# Altium PCB PCBtodojunto.PcbDoc (part 2 of 2)
Units mm, origin at the board's own origin, x right, y up, seen from the top; angles counter-clockwise.
Board outline 200 x 200 mm, 2 copper layers (Top Layer, Bottom Layer); 188 components, 125 nets, 535 pads, 53 vias.
Unrouted connection lines stored in the file: 78.
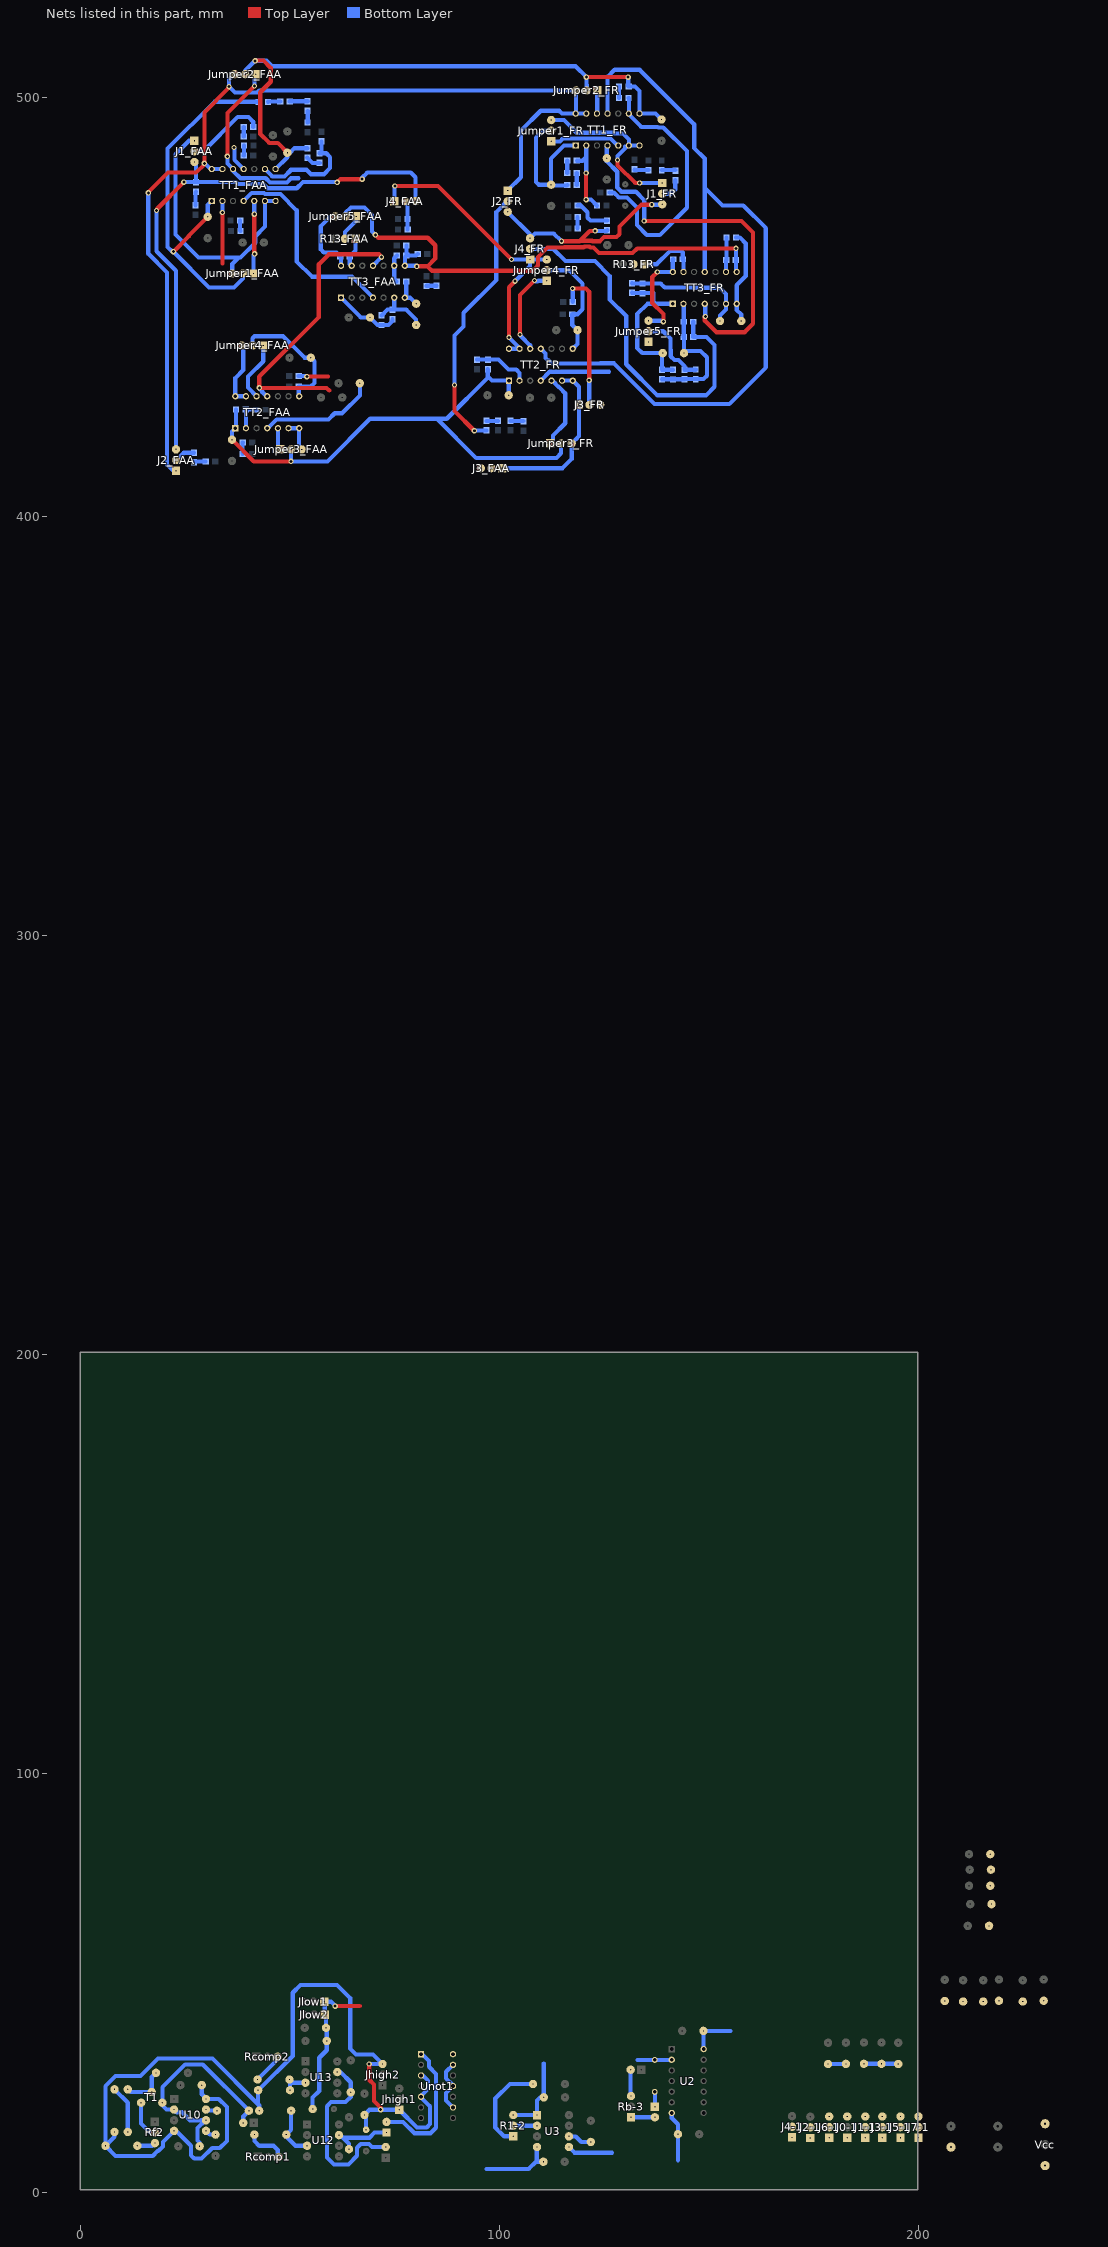
[diagram p2: the nets of this part, all layers, seen from the top]

## Via types
v1: diameter 1.27, hole 0.711, Top Layer to Bottom Layer, 53 vias

## Nets (pads, with @x,y where several pads share a name; then routed paths per layer and width w, separated by ;. In a path a pad name is that pad's centre, name@x,y a point inside that pad or via, vN(x,y) a via of type N, cw(c..) or ccw(c..) an arc to the next point about the centre after c; other vN are vias at no path point) (continued)
NetC9_FAA_2: C9_FAA.2 R18.b_FAA.2 R18_FAA.2 R20.b_FAA.1 R20_FAA.1 TT3_FAA.1 | length 18.2
  Bottom Layer w1: TT3_FAA.1@62.136,452.304 66.867,447.573 C9_FAA.2@69.056,447.573 70.842,445.787 R20.b_FAA.1@71.846,445.787 73.47,445.787 74.446,446.763 R20_FAA.1@74.446,447.17 R20_FAA.1@74.443,447.167 ; R18.b_FAA.2@82.556,455.09 82.606,455.14 R18_FAA.2@84.916,455.14
NetC9_FR_1: C9_FR.1 R17.b_FR.2 R17_FR.2 R18.b_FR.1 R18_FR.1 R22.b_FR.1 R22_FR.1 TT3_FR.2 | length 33.7
  Bottom Layer w1: R18.b_FR.1@138.746,432.81 141.329,432.81 R18_FR.1@141.376,432.763 141.423,432.81 R22.b_FR.1@144.126,432.81 144.179,432.863 R22_FR.1@146.826,432.863 148.696,432.863 149.496,433.663 149.496,438.083 147.986,439.593 144.546,439.593 C9_FR.1@144.016,439.063 144.016,442.89 R17.b_FR.2@143.963,442.943 R17_FR.2@143.963,446.553 143.963,450.765 TT3_FR.2@143.898,450.83
NetC9_FR_2: C9_FR.2 R18.b_FR.2 R18_FR.2 R20.b_FR.1 R20_FR.1 TT3_FR.1 | length 38.9
  Bottom Layer w1: R20_FR.1@131.636,453.463 131.706,453.393 R20.b_FR.1@134.076,453.393 136.74,453.393 136.746,453.387 136.746,451.393 137.309,450.83 ; TT3_FR.1@141.358,450.83 137.309,450.83 ; R18_FR.2@141.376,435.049 141.329,435.096 R18.b_FR.2@138.746,435.096 138.746,438.873 C9_FR.2@138.936,439.063 134.066,439.063 132.846,440.283 132.846,448.393 135.283,450.83 137.309,450.83
NetC10_FAA_1: C10_FAA.1 R20.b_FAA.2 R20_FAA.2 TT3_FAA.6 | length 14.1
  Bottom Layer w1: R20.b_FAA.2@71.846,448.073 73.229,449.456 R20_FAA.2@74.446,449.456 ; TT3_FAA.6@74.836,452.304 74.836,449.846 R20_FAA.2@74.446,449.456 ; C10_FAA.1@80.066,445.783 80.066,447.083 77.693,449.456 R20_FAA.2@74.446,449.456
NetC10_FAA_2: C10_FAA.2 R19_FAA.1 TT3_FAA.7 | length 7.3
  Bottom Layer w1: R19_FAA.1@77.689,456.163 77.689,452.617 TT3_FAA.7@77.376,452.304 78.625,452.304 C10_FAA.2@80.066,450.863
NetC10_FR_1: C10_FR.1 R20.b_FR.2 R20_FR.2 TT3_FR.6 | length 30.5
  Bottom Layer w1: R20_FR.2@131.636,455.749 131.706,455.679 R20.b_FR.2@134.076,455.679 138.452,455.679 139.428,454.703 146.228,454.703 146.278,454.653 152.606,454.653 154.058,453.201 TT3_FR.6@154.058,450.83 154.058,449.485 152.626,448.053 C10_FR.1@152.626,446.733
NetC10_FR_2: C10_FR.2 R19_FR.1 TT3_FR.7 | length 22.8
  Bottom Layer w1: R19_FR.1@156.449,466.663 157.346,466.663 158.766,465.243 158.766,457.443 156.598,455.275 TT3_FR.7@156.598,450.83 156.598,449.361 157.706,448.253 C10_FR.2@157.706,446.733
NetCcv_1: Ccv.1 U10.5 | length 2.7
  Bottom Layer w1: U10.5@29.896,14.619 30.785,13.73 Ccv.1@32.182,13.73
NetCf_1: Cf.1 Jsierra.2 R3.1 T1.2 U10.2 U10.6 | length 54.5
  Bottom Layer w1: Cf.1@28.372,10.936 28.372,11.825 27.864,12.333 27.864,15.274 U10.6@29.749,17.159 ; U10.6@29.896,17.159 U10.6@29.749,17.159 ; Jsierra.2@38.786,16.524 38.786,18.048 40.183,19.445 29.134,30.494 24.923,30.494 19.482,25.053 T1.2@19.482,21.35 19.482,20.715 20.498,19.699 U10.2@22.276,19.699 22.916,19.059 24.176,19.059 26.076,17.159 U10.6@29.749,17.159
NetCh_1: Ch.1 U3.6 | length 5.8
  Bottom Layer w1: U3.6@116.55,13.306 118.17,13.306 119.5,11.976 Ch.1@121.78,11.976
NetD1_2: D1.2 D2.1 | length 11.5
  Bottom Layer w1: D1.2@8.052,24.525 11.227,21.35 D2.1@11.227,14.365
NetD2_2: D2.2 Rd.2 T1.1 | length 11
  Bottom Layer w1: D2.2@11.227,24.525 11.862,23.89 T1.1@16.942,23.89 16.942,27.446 Rd.2@17.958,28.462
NetJ0-1_1: J0-1.1 J1-1.3
NetJ1-1_2: J1-1.2 J2-1.2
NetJ1-3_2: J1-3.2 Rb-3.3 | length 6.3
  Bottom Layer w1: J1-3.2@131.28,29.226 131.28,23.036 Rb-3.3@131.38,22.936
NetJ1_FAA_2: J1_FAA.2 R6.b_FAA.1 | length 19.2
  Bottom Layer w1: J1_FAA.2@27.13,487.233 29.25,487.233 37.46,495.443 40.02,495.443 41.179,494.284 R6.b_FAA.1@41.179,493.023
NetJ1_FR_2: J1_FR.2 R6.b_FR.1 | length 5.7
  Bottom Layer w1: J1_FR.2@138.826,477.133 140.946,477.133 141.946,478.133 R6.b_FR.1@141.946,480.323
NetJ2-1_1: J2-1.1 J3-1.3
NetJ2-3_1: J2-3.1 R1-3.1 | length 3.6
  Bottom Layer w1: R1-3.1@137.03,23.936 137.07,23.896 J2-3.1@137.07,20.386
NetJ2-3_2: J2-3.2 Rb-3.1 | length 5.7
  Bottom Layer w1: Rb-3.1@131.38,17.856 137.06,17.856 J2-3.2@137.07,17.846
NetJ2_FAA_2: J2_FAA.2 R10.b_FAA.1 | length 5
  Bottom Layer w1: J2_FAA.2@22.736,413.543 22.883,413.543 24.606,415.266 R10.b_FAA.1@27.056,415.266
NetJ2_FR_2: J2_FR.2 R10.b_FR.1 | length 64.8
  Top Layer w1: v1(89.23,431.44) 89.23,425.25 v1(93.95,420.53)
  Bottom Layer w1: v1(89.23,431.44) 89.23,443.28 91.4,445.45 91.4,448.71 99.21,456.52 99.21,472.767 101.773,475.33 J2_FR.2@101.92,475.33 ; v1@94.183,420.603 R10.b_FR.1@96.876,420.603
NetJ3-1_2: J3-1.2 J4-1.2
NetJ3_FAA_2: J3_FAA.2 R14_FAA.1 | length 6.8
  Top Layer w1: v1(53.98,433.443) 59.06,433.443
  Bottom Layer w1: R14_FAA.1@52.019,433.593 v1@53.78,433.593
NetJ3_FR_2: J3_FR.2 R14_FR.1 | length 34.6
  Top Layer w1: v1(117.442,454.499) 120.59,454.499 121.386,453.703 v1(121.386,432.583) ; J3_FR.2@121.386,426.793 J3_FR.2@121.466,426.713
  Bottom Layer w1: R14_FR.1@117.442,451.316 v1(117.442,454.499) ; v1(121.386,432.583) 121.386,426.793 J3_FR.2@121.466,426.713
NetJ4-1_1: J4-1.1 J5-1.3
NetJ4_FAA_2: J4_FAA.2 R17.b_FAA.1 R17_FAA.1 | length 7
  Bottom Layer w1: J4_FAA.2@77.406,475.363 78.019,474.75 R17.b_FAA.1@78.019,471.083 78.029,471.073 R17_FAA.1@78.029,468.593
NetJ4_FR_2: J4_FR.2 R17.b_FR.1 R17_FR.1 | length 88.9
  Bottom Layer w1: J4_FR.2@107.276,463.953 112.806,463.953 115.736,461.023 122.746,461.023 126.276,457.493 126.276,451.863 130.236,447.903 130.236,436.403 137.656,428.983 149.286,428.983 151.336,431.033 151.336,440.993 149.386,442.943 R17.b_FR.1@146.249,442.943 R17_FR.1@146.249,446.553
NetJ5-1_2: J5-1.2 J6-1.2
NetJ6-1_1: J6-1.1 J7-1.3
NetJcomp1_1: Jcomp1.1 Rup1.1 U12.7 | length 15.4
  Bottom Layer w1: U12.7@61.646,13.603 61.993,13.603 62.623,12.973 ; Rup1.1@64.04,10.256 64.04,11.556 62.623,12.973 ; Jcomp1.1@73,14.22 70.157,14.22 68.91,12.973 62.623,12.973
NetJcomp1_2: Jcomp1.2 Unot1.1 | length 32.7
  Bottom Layer w1: Jcomp1.2@73,16.76 76.956,16.76 79.66,14.056 83.53,14.056 84.84,15.366 84.84,28.206 83.13,29.916 83.13,31.296 81.5,32.926 Unot1.1@81.25,32.926
NetJcomp2_2: Jcomp2.2 Rup2.1 U13.7 | length 44.6
  Bottom Layer w1: U13.7@61.26,28.656 62.01,28.656 64.45,26.216 Rup2.1@64.45,23.836 64.45,22.726 63.2,21.476 59.757,21.476 58.79,20.509 58.79,8.296 60.463,6.623 63.887,6.623 65.94,8.676 65.94,10.596 66.837,11.493 68.827,11.493 69.554,10.766 Jcomp2.2@72.79,10.766
NetJumper1_FAA_1: Jumper1_FAA.1 TT1_FAA.5 | length 16.9
  Top Layer w1: v1@41.426,463.239 v1(41.426,472.249)
  Bottom Layer w1: Jumper1_FAA.1@41.24,458.083 41.24,462.503 v1(41.51,462.773) ; v1(41.426,472.249) TT1_FAA.5@41.426,475.384
NetJumper1_FR_1: Jumper1_FR.1 TT1_FR.5 | length 17
  Bottom Layer w1: Jumper1_FR.1@112.306,489.623 114.416,489.623 115.066,490.273 126.46,490.273 128.11,488.623 TT1_FR.5@128.316,488.623
NetJumper2_FAA_1: Jumper2_FAA.1 TT1_FAA.12 | length 43.6
  Top Layer w1: v1(35,486.043) 35,496.363 v1(41.46,502.823)
  Bottom Layer w1: v1(35,486.043) 35,484.35 TT1_FAA.12@36.346,483.004 36.346,482.587 38.114,480.82 44.171,480.82 45.156,479.834 49.211,479.834 50.197,480.82 51.98,480.82 ; v1(41.46,502.823) 41.46,505.333 Jumper2_FAA.1@41.79,505.663
NetJumper2_FR_1: Jumper2_FR.1 TT1_FR.12 | length 5.6
  Bottom Layer w1: TT1_FR.12@123.236,496.243 123.326,496.333 Jumper2_FR.1@123.326,501.783
NetJumper3_FAA_1: Jumper3_FAA.1 TT2_FAA.5 | length 5.3
  Bottom Layer w1: TT2_FAA.5@47.056,421.14 47.056,416.677 Jumper3_FAA.1@47.66,416.073
NetJumper3_FR_1: Jumper3_FR.1 TT2_FR.5 | length 18
  Bottom Layer w1: Jumper3_FR.1@112.126,417.503 112.766,418.143 112.766,419.403 115.67,422.307 115.67,429.46 114.291,430.839 114.235,430.839 113.268,431.806 113.268,431.862 112.641,432.489 TT2_FR.5@112.378,432.489
NetJumper4_FAA_1: Jumper4_FAA.1 TT2_FAA.12 | length 14.5
  Bottom Layer w1: TT2_FAA.12@41.976,428.76 39.91,430.826 39.91,433.443 43.57,437.103 Jumper4_FAA.1@43.57,440.893
NetJumper4_FR_1: Jumper4_FR.1 TT2_FR.12 | length 21.1
  Top Layer w1: v1(104.88,443.52) 104.88,452.95 v1(108.31,456.38)
  Bottom Layer w1: v1@105.05,443.17 107.298,440.922 TT2_FR.12@107.298,440.109 ; v1@108.54,456.14 109.12,456.14 109.303,456.323 Jumper4_FR.1@111.246,456.323
NetJumper5_FAA_1: Jumper5_FAA.1 R13_FAA.2 | length 6.5
  Bottom Layer w1: R13_FAA.2@63.066,466.363 63.066,468.013 65.786,470.733 Jumper5_FAA.1@65.786,471.703
NetJumper5_FR_1: Jumper5_FR.1 R13_FR.2
NetR1-2_1: R1-2.1 R2-2.2 | length 22.5
  Bottom Layer w1: R1-2.1@103.27,13.316 101.1,13.316 98.97,15.446 98.97,22.326 102.45,25.806 R2-2.2@107.97,25.806
NetR1-2_2: R1-2.2 U3.2 | length 5.7
  Bottom Layer w1: R1-2.2@103.27,15.856 108.92,15.856 U3.2@108.93,15.846
NetR1.b_FAA_2: R1.b_FAA.2 R1_FAA.1 | length 2.4
  Bottom Layer w1: R1_FAA.1@38.893,486.223 38.963,486.293 R1.b_FAA.2@38.963,488.613
NetR1.b_FR_2: R1.b_FR.2 R1_FR.1 | length 3.4
  Bottom Layer w1: R1_FR.1@132.186,482.86 132.286,482.76 R1.b_FR.2@135.516,482.76
NetR2.b_FAA_1: R2.b_FAA.1 R2_FAA.2 | length 2.5
  Bottom Layer w1: R2.b_FAA.1@38.043,470.693 38.043,468.343 R2_FAA.2@38.143,468.243
NetR2.b_FR_1: R2.b_FR.1 R2_FR.2 | length 2.6
  Bottom Layer w1: R2.b_FR.1@118.629,468.863 R2_FR.2@118.629,471.513
NetR3.b_FAA_2: R3.b_FAA.2 R3_FAA.1 | length 3.3
  Bottom Layer w1: R3_FAA.1@27.356,474.376 27.356,477.44 R3.b_FAA.2@27.526,477.61
NetR3.b_FR_2: R3.b_FR.2 R3_FR.1 | length 9.4
  Bottom Layer w1: R3_FR.1@118.616,474.273 118.716,474.373 119.326,474.373 121.006,472.693 121.006,471.393 121.693,470.706 R3.b_FR.2@125.686,470.706
NetR3_2: R3.2 U10.7 | length 2.8
  Bottom Layer w1: U10.7@29.896,19.699 30.15,19.445 R3.2@32.519,19.445 R3.2@32.563,19.445
NetR4.b_FAA_1: R4.b_FAA.1 R4_FAA.1 | length 4.3
  Bottom Layer w1: R4.b_FAA.1@49.893,499.173 49.906,499.186 R4_FAA.1@54.17,499.186
NetR4.b_FAA_2: R4.b_FAA.2 R4.c_FAA.1 | length 2.9
  Bottom Layer w1: R4.c_FAA.1@44.713,499.063 44.823,499.173 R4.b_FAA.2@47.607,499.173
NetR4.b_FR_1: R4.b_FR.1 R4_FR.1 | length 2.9
  Bottom Layer w1: R4.b_FR.1@116.143,482.093 116.143,484.986 R4_FR.1@116.16,485.003
NetR4.b_FR_2: R4.b_FR.2 R4.c_FR.1 | length 2.9
  Bottom Layer w1: R4.c_FR.1@118.416,479.213 118.416,482.08 R4.b_FR.2@118.429,482.093
NetR4_FAA_2: R4_FAA.2 R5_FAA.2 TT1_FAA.2 | length 17.7
  Top Layer w1: 33.806,460.477 v1(33.806,472.639)
  Bottom Layer w1: v1(33.806,472.639) TT1_FAA.2@33.806,475.384 ; R5_FAA.2@54.13,494.116 54.17,494.156 R4_FAA.2@54.17,496.9
NetR4_FR_2: R4_FR.2 R5_FR.2 TT1_FR.2 | length 18.6
  Top Layer w1: v1@120.646,475.593 v1(120.646,475.713) v1(120.646,482.073)
  Bottom Layer w1: R4_FR.2@118.446,485.003 119.796,485.003 120.696,485.903 ; v1(120.646,475.713) 121.783,475.713 R5_FR.2@123.243,474.253 ; v1@120.696,482.283 120.696,485.903 ; TT1_FR.2@120.696,488.623 120.696,485.903
NetR6.b_FAA_2: R6.b_FAA.2 R6_FAA.1 | length 2.2
  Bottom Layer w1: R6_FAA.1@38.893,490.773 R6.b_FAA.2@38.893,493.023
NetR6.b_FR_2: R6.b_FR.2 R6_FR.1 | length 3.2
  Bottom Layer w1: R6_FR.1@138.706,482.76 138.726,482.78 R6.b_FR.2@141.914,482.78
NetR6_2: R6.2 Rcomp2.3 | length 7.7
  Bottom Layer w1: R6.2@42.43,26.876 R6.2@42.21,26.876 47.01,31.676 Rcomp2.3@47.01,32.326
NetR7.b_FAA_1: R7.b_FAA.1 R7_FAA.1 | length 3.5
  Bottom Layer w1: R7_FAA.1@54.09,485.71 54.09,485.693 55.293,484.49 R7.b_FAA.1@57.05,484.49
NetR7.b_FAA_2: R7.b_FAA.2 R8_FAA.2 TT1_FAA.9 | length 26.6
  Bottom Layer w1: TT1_FAA.9@43.966,483.004 45.736,481.234 48.631,481.234 50.13,482.733 50.13,482.85 53.863,482.85 54.94,481.773 58.05,481.773 59.54,483.263 59.54,485.843 58.607,486.776 R7.b_FAA.2@57.05,486.776 57.48,487.206 R8_FAA.2@57.48,489.62
NetR7.b_FR_1: R7.b_FR.1 R7_FR.1 | length 2.7
  Bottom Layer w1: R7.b_FR.1@128.49,499.973 128.49,502.693 R7_FR.1@128.51,502.713
NetR7.b_FR_2: R7.b_FR.2 R8_FR.2 TT1_FR.9 | length 62.7
  Bottom Layer w1: R8_FR.2@126.303,477.42 127.253,477.42 128.463,476.21 130.383,476.21 132.81,473.783 132.81,469.62 135.14,467.29 138.25,467.29 144.72,473.76 144.72,487.29 139.067,492.943 137.879,492.943 137.763,493.06 133.83,493.06 130.856,496.034 TT1_FR.9@130.856,496.243 130.856,499.893 R7.b_FR.2@130.776,499.973
NetR7_2: R7.2 Rcomp1.3 | length 9.8
  Bottom Layer w1: R7.2@41.453,13.73 41.453,12.206 42.596,11.063 46.025,11.063 47.041,10.047 47.041,8.65 Rcomp1.3@47.295,8.396
NetR9.b_FAA_2: R9.b_FAA.2 R9_FAA.1 | length 2.7
  Bottom Layer w1: R9.b_FAA.2@38.643,415.023 38.643,417.653 R9_FAA.1@38.693,417.703
NetR9.b_FR_2: R9.b_FR.2 R9_FR.1 | length 3.1
  Bottom Layer w1: R9.b_FR.2@102.576,422.889 102.646,422.819 R9_FR.1@105.656,422.819
NetR10.b_FAA_2: R10.b_FAA.2 R10_FAA.1 | length 2.8
  Bottom Layer w1: R10.b_FAA.2@27.056,412.98 27.269,413.193 R10_FAA.1@29.81,413.193
NetR10.b_FR_2: R10.b_FR.2 R10_FR.1 | length 2.7
  Bottom Layer w1: R10.b_FR.2@96.876,422.889 R10_FR.1@99.586,422.889
NetR11_FAA_2: R11_FAA.2 R12_FAA.2 TT2_FAA.2 | length 7
  Bottom Layer w1: TT2_FAA.2@39.436,421.14 39.436,425.49 R11_FAA.2@39.343,425.583 41.827,425.583 R12_FAA.2@41.867,425.543
NetR11_FR_2: R11_FR.2 R12_FR.2 TT2_FR.2 | length 13.3
  Bottom Layer w1: R12_FR.2@94.575,437.502 97.176,437.502 R11_FR.2@97.186,437.512 99.77,437.512 102.156,435.126 103.966,435.126 104.758,434.334 TT2_FR.2@104.758,432.489
NetR13_FAA_1: R13_FAA.1 R15_FAA.1 TT3_FAA.13 | length 7.2
  Bottom Layer w1: TT3_FAA.13@64.676,459.924 64.229,460.371 R15_FAA.1@64.229,462.163 65.606,463.54 R13_FAA.1@65.606,466.363
NetR13_FR_1: R13_FR.1 R15_FR.1 TT3_FR.13 | length 15.4
  Bottom Layer w1: R13_FR.1@134.506,460.273 137.496,460.273 140.676,463.453 143.446,463.453 143.739,463.16 R15_FR.1@143.739,461.473 143.898,461.314 TT3_FR.13@143.898,458.45
NetR19_FAA_2: R19_FAA.2 R21_FAA.1 TT3_FAA.9 | length 6.7
  Bottom Layer w1: R19_FAA.2@75.403,456.163 74.836,456.73 TT3_FAA.9@74.836,459.924 74.836,461.706 R21_FAA.1@75.463,462.333
NetR19_FR_2: R19_FR.2 R21_FR.1 TT3_FR.9 | length 8.4
  Bottom Layer w1: TT3_FR.9@154.133,458.525 TT3_FR.9@154.058,458.45 154.058,461.168 R21_FR.1@154.133,461.243 154.163,461.273 R19_FR.2@154.163,466.663
NetRf1_1: Rf1.1 Rf2.3 | length 4.5
  Bottom Layer w1: Rf1.1@13.513,11.063 17.069,11.063 Rf2.3@17.704,11.698
NetRf2_2: Rf2.2 T1.3 | length 9.1
  Bottom Layer w1: T1.3@14.402,21.35 14.402,16.397 16.561,14.238 Rf2.2@17.704,14.238
Output: J7-1.2 Output.2
Output1: J3-1.1 U3.5 | length 10.9
  Bottom Layer w1: U3.5@116.55,10.766 117.9,9.416 126.85,9.416
Output2: J5-1.1 R1-3.2 U2.2 | length 8.2
  Bottom Layer w1: 132.9,31.556 R1-3.2@137.03,31.556 141.05,31.556 U2.2@141.09,31.596
VCC: Unot1.14
Vcc+_FAA: Ccoup1-2.1 Ccoup1-3.1 Ccoup1-4.1 Ccoup1.1 Ccoup2-4.1 Ccoup2.1 Ccoup3-4.1 Ccoup3.1 CD1_FAA.1 CD1_FR.1 CD2_FAA.1 CD2_FR.1 CD3_FAA.1 CD3_FR.1 D1.1 Jhigh1.1 Jhigh2.3 R1-2.3 R4.2 R5.2 Rf1.2 TT1_FAA.4 TT1_FR.4 TT2_FAA.4 TT2_FR.4 TT3_FAA.4 TT3_FR.4 U2.14 U3.1 U10.4 U10.8 Unot1.3 Unot1.5 Unot1.9 Unot1.11 Unot1.13 Vcc.3 | length 470.5
  Top Layer w1: v1(68.87,30.586) 68.87,26.836 70.01,25.696 70.01,21.746 71.6,20.156 v1(71.6,19.666) ; v1(134.516,470.613) 157.766,470.613 160.526,467.853 160.526,446.063 158.506,444.043 151.746,444.043 148.978,446.811 v1@148.978,447.605
  Bottom Layer w1: D1.1@8.052,14.365 8.052,13.222 Rf1.2@5.893,11.063 ; Ccoup1-4.1@28.88,25.541 28.88,23.382 29.896,22.366 U10.8@29.896,22.239 32.944,22.239 34.876,20.307 34.876,12.233 33.193,10.55 31.395,10.55 28.86,8.015 27.102,8.015 26.34,8.777 26.34,11.063 22.784,14.619 U10.4@22.276,14.619 19.604,11.947 19.604,10.911 18.491,9.798 18.344,9.798 17.196,8.65 8.306,8.65 Rf1.2@5.893,11.063 ; TT1_FAA.4@38.886,475.384 40.805,477.303 43.728,477.303 43.997,477.034 47.669,477.034 51.55,473.153 51.55,460.949 55.186,457.313 64.747,457.313 TT3_FAA.4@69.756,452.304 ; R4.2@42.596,19.445 42.596,20.715 42.215,21.096 ; TT2_FAA.4@44.516,421.14 44.723,421.14 46.776,423.193 59.12,423.193 60.63,424.703 62.39,424.703 66.63,428.943 CD1_FAA.1@66.63,431.863 ; Ccoup3-4.1@68.123,14.873 68.123,18.048 Ccoup2-4.1@67.742,18.429 68.969,19.656 Jhigh1.1@76.04,19.656 80.24,15.456 82.6,15.456 83.39,16.246 83.39,20.476 81.25,22.616 Unot1.5@81.25,22.766 81.25,22.973 82.9,24.623 82.9,26.606 81.66,27.846 Unot1.3@81.25,27.846 ; v1(68.87,30.586) Jhigh2.3@72.04,30.586 69.77,32.856 65.737,32.856 64.32,34.273 64.32,46.306 61.17,49.456 52.47,49.456 50.61,47.596 50.61,32.516 42.43,24.336 R5.2@42.34,24.336 42.34,21.221 42.215,21.096 ; Unot1.9@88.87,20.226 87.22,21.876 87.22,23.656 Unot1.11@88.87,25.306 88.87,25.513 87.22,27.163 87.22,28.736 Unot1.13@88.87,30.386 ; R1-2.3@103.27,18.396 108.92,18.396 U3.1@108.93,18.386 108.93,21.876 109.67,22.616 Ccoup1-2.1@110.55,22.616 110.55,30.716 ; TT2_FR.4@109.838,432.489 111.979,434.63 126.1,434.63 ; TT1_FR.4@125.776,488.623 125.596,488.443 CD1_FR.1@125.596,485.593 125.596,484.844 128.08,482.36 128.08,478.573 129.043,477.61 132.49,477.61 134.516,475.584 v1(134.516,470.613) ; U2.14@148.71,34.136 148.71,38.446 Ccoup1-3.1@148.67,38.486 155.15,38.486 ; TT3_FR.4@148.978,450.83 149.106,450.702 v1(149.106,447.793) ; CD2_FR.1@178.41,30.576 178.442,30.608 CD3_FR.1@182.678,30.608 ; Rf1.2@5.893,11.063 5.893,25.287 8.306,27.7 14.275,27.7 18.469,31.894 31.417,31.894 42.215,21.096
Vcc-_FAA: Ccoup2-2.1 Ccoup2-3.1 Ccoup4-4.1 Ccoup4.1 Ccoup5-5.1 Ccoup5.1 Ccoup6-5.1 Ccoup6.1 CD4_FAA.1 CD4_FR.1 CD5_FAA.1 CD5_FR.1 CD6_FAA.1 CD6_FR.1 Jlow1.1 Jlow2.1 TT1_FAA.11 TT1_FR.11 TT2_FAA.11 TT2_FR.11 TT3_FAA.11 TT3_FR.11 U2.7 U3.4 Vcc.1 | length 341.4
  Top Layer w1: 59.33,430.123 58.69,430.763 v1(42.62,430.763) 42.62,433.434 56.83,447.644 56.83,460.283 59.22,462.673 71.18,462.673 71.81,462.043 v1(71.81,461.978) ; v1(60.74,44.406) 66.62,44.406
  Bottom Layer w1: v1@36.677,487.936 36.677,485.213 TT1_FAA.11@38.886,483.004 ; v1@42.67,430.543 43.344,429.87 43.344,429.726 44.31,428.76 TT2_FAA.11@44.516,428.76 ; Ccoup4-4.1@55.36,19.826 55.36,22.556 56.94,24.136 56.94,32.086 58.73,33.876 Ccoup6-5.1@58.73,36.096 58.73,39.036 Ccoup5-5.1@58.55,39.216 58.55,42.086 Jlow2.1@58.25,42.386 58.25,45.316 Jlow1.1@58.1,45.466 59.77,45.466 v1@60.61,44.626 ; TT3_FAA.11@69.756,459.924 v1(71.81,461.978) ; 96.86,5.526 106.94,5.526 108.66,7.246 109.43,7.246 ; U3.4@108.93,10.766 108.86,10.696 108.86,7.816 109.43,7.246 ; TT2_FR.11@109.838,440.109 110.958,438.989 110.958,437.87 111.526,437.302 111.818,437.302 112.52,436.6 124,436.6 124.03,436.63 127.29,436.63 136.97,426.95 154.84,426.95 163.56,435.67 163.56,468.89 158.16,474.29 153.19,474.29 149,478.48 148.978,478.48 ; Ccoup2-2.1@110.45,7.246 109.43,7.246 ; TT1_FR.11@125.776,496.243 125.776,505.033 127.466,506.723 133.436,506.723 146.45,493.71 146.45,488.037 148.978,485.508 148.978,478.48 ; U2.7@141.09,18.896 141.09,17.676 142.57,16.196 Ccoup2-3.1@142.57,13.826 142.57,7.586 ; TT3_FR.11@148.978,458.45 148.978,478.48 ; CD4_FR.1@186.99,30.626 CD5_FR.1@191.18,30.626 195.13,30.626 CD6_FR.1@195.17,30.586
  other v1: 36.58,488.153
Vi_FAA: J0-1.3 J1_FAA.3 J2_FAA.3 J3_FAA.3 J4_FAA.3 R3.b_FAA.1 | length 135.9
  Top Layer w1: v1@18.26,473.533 v1(24.6,479.873) ; v1(61.21,479.82) 61.98,480.59 v1(67.17,480.59)
  Bottom Layer w1: v1(18.08,473.113) 18.08,463.373 22.736,458.717 J2_FAA.3@22.736,416.083 ; v1@24.823,479.896 R3.b_FAA.1@27.526,479.896 ; J1_FAA.3@27.13,484.693 27.526,484.297 R3.b_FAA.1@27.526,479.896 ; v1@60.746,479.896 53.037,479.896 51.575,478.434 44.577,478.434 43.591,479.42 37.534,479.42 37.057,479.896 R3.b_FAA.1@27.526,479.896 ; v1@67.09,480.9 68.41,482.22 78.78,482.22 79.946,481.054 J4_FAA.3@79.946,475.363
Vi_FR: J1_FR.3 J2_FR.3 J3_FR.3 J4_FR.3 J6-1.3 R3.b_FR.1 | length 53.7
  Top Layer w1: v1(114.756,465.793) 119.076,465.793 119.171,465.888 ; v1(122.806,468.243) 121.526,468.243 119.171,465.888 ; v1(136.32,474.5) 133.853,474.5 128.616,469.263 128.616,467.453 127.916,466.753 124.909,466.753 123.949,465.793 122.147,465.793 122.052,465.888 119.171,465.888
  Bottom Layer w1: J2_FR.3@101.92,472.79 107.276,467.434 J4_FR.3@107.276,466.493 108.426,467.643 112.906,467.643 v1(114.756,465.793) ; v1(122.806,468.243) 125.509,468.243 R3.b_FR.1@125.686,468.42 ; v1(136.32,474.5) 138.733,474.5 J1_FR.3@138.826,474.593
Vo(E1): J1_FAA.1 J1_FR.1 Jumper1_FAA.3 Jumper1_FR.3 TT1_FAA.6 TT1_FAA.7 TT1_FR.6 TT1_FR.7 | length 108.8
  Top Layer w1: v1(128.166,485.173) 128.166,483.903 132.396,479.673 v1(133.446,479.673)
  Bottom Layer w1: J1_FAA.1@27.13,489.773 25.85,489.773 22.63,486.553 22.63,467.353 28.08,461.903 37.72,461.903 ; Jumper1_FAA.3@36.16,458.083 36.16,460.343 37.72,461.903 ; TT1_FAA.7@46.506,475.384 TT1_FAA.6@43.966,475.384 43.966,469.266 41.67,466.97 41.67,465.423 38.15,461.903 37.72,461.903 ; Jumper1_FR.3@112.306,494.703 115.336,494.703 118.366,491.673 127.04,491.673 127.23,491.483 129.466,491.483 130.856,490.093 TT1_FR.6@130.856,488.623 ; v1(128.166,485.173) 128.166,486.14 129.966,487.94 129.966,488.373 130.606,488.373 TT1_FR.6@130.856,488.623 ; TT1_FR.7@133.396,488.623 TT1_FR.6@130.856,488.623 ; v1(133.446,479.673) J1_FR.1@138.826,479.673
Vo(E2)_FAA: J2_FAA.1 J2_FR.1 Jumper2_FAA.3 Jumper2_FR.3 TT1_FAA.13 TT1_FAA.14 TT1_FR.13 TT1_FR.14 | length 236.6
  Top Layer w1: v1@16.4,477.723 20.83,482.153 27.54,482.153 29.51,484.123 v1(29.51,484.363) 29.51,496.553 v1@35.3,502.343
  Bottom Layer w1: v1(16.12,477.323) 16.12,462.803 20.61,458.313 20.61,412.423 22.03,411.003 J2_FAA.1@22.736,411.003 ; v1@29.78,484.173 30.949,483.004 TT1_FAA.14@31.266,483.004 TT1_FAA.13@33.806,483.004 ; Jumper2_FAA.3@36.71,505.663 35.41,504.363 v1(35.41,502.693) 36.815,501.288 42.096,501.288 42.591,501.783 Jumper2_FR.3@118.246,501.783 118.246,496.333 TT1_FR.14@118.156,496.243 ; J2_FR.1@101.92,477.87 105.1,481.05 105.1,492.197 109.826,496.923 114.216,496.923 114.896,496.243 TT1_FR.14@118.156,496.243 ; TT1_FR.13@120.696,496.243 TT1_FR.14@118.156,496.243
Vo(E3): J3_FAA.1 J3_FR.1 Jumper3_FAA.3 Jumper3_FR.3 TT2_FAA.6 TT2_FAA.7 TT2_FR.6 TT2_FR.7 | length 48
  Bottom Layer w1: TT2_FAA.6@49.596,421.14 TT2_FAA.7@52.136,421.14 52.136,416.677 Jumper3_FAA.3@52.74,416.073 ; J3_FAA.1@100.59,411.59 115.03,411.59 117.206,413.766 Jumper3_FR.3@117.206,417.503 118.926,419.223 J3_FR.1@118.926,426.713 118.926,431.021 TT2_FR.7@117.458,432.489 TT2_FR.6@114.918,432.489
Vo(E4)_FAA: J4_FAA.1 J4_FR.1 Jumper4_FAA.3 Jumper4_FR.3 TT2_FAA.13 TT2_FAA.14 TT2_FR.13 TT2_FR.14 | length 89.2
  Top Layer w1: v1(74.99,478.97) 85.27,478.97 v1(102.827,461.413) ; v1(102.26,442.83) 102.26,454.8 v1(103.69,456.23)
  Bottom Layer w1: Jumper4_FAA.3@38.49,440.893 38.8,440.583 38.8,435.033 36.896,433.129 TT2_FAA.14@36.896,428.76 TT2_FAA.13@39.436,428.76 ; J4_FAA.1@74.866,475.363 v1@74.866,478.766 ; TT2_FR.14@102.218,440.109 TT2_FR.13@104.758,440.109 104.758,440.272 v1@102.44,442.59 ; v1(102.827,461.413) J4_FR.1@107.276,461.413 ; v1(103.69,456.23) 107.276,459.816 J4_FR.1@107.276,461.413 ; Jumper4_FR.3@111.246,461.403 111.236,461.413 J4_FR.1@107.276,461.413
Vo(E5)_FAA: J1-1.1 Jumper5_FAA.3 R15_FAA.2 TT3_FAA.14 | length 17.6
  Bottom Layer w1: Jumper5_FAA.3@60.706,471.703 59.646,471.703 57.316,469.373 57.316,463.773 58.006,463.083 61.023,463.083 R15_FAA.2@61.943,462.163 62.136,461.97 TT3_FAA.14@62.136,459.924
Vo(E5)_FR: J7-1.1 Jumper5_FR.3 R15_FR.2 TT3_FR.14 | length 23.8
  Top Layer w1: v1(137.66,458.45) 136.45,457.24 136.45,451.02 139.1,448.37 v1(139.1,446.58)
  Bottom Layer w1: Jumper5_FR.3@135.546,446.813 v1@139.073,446.813 ; v1(137.66,458.45) TT3_FR.14@141.358,458.45 141.358,461.378 R15_FR.2@141.453,461.473
Vo(J1): C2_FAA.2 C2_FR.2 Jumper1_FAA.2 Jumper1_FR.2 R4.c_FAA.2 R4.c_FR.2 TT1_FAA.1 TT1_FR.1 | length 125.7
  Top Layer w1: v1(22.11,463.273) 25.76,466.923 25.76,467.033 30.296,471.569 C2_FAA.2@30.296,471.603
  Bottom Layer w1: v1@21.84,463.323 20.73,464.433 20.73,487.903 31.89,499.063 R4.c_FAA.2@42.427,499.063 ; v1(22.11,463.273) 30.62,454.763 36.58,454.763 38.7,456.883 Jumper1_FAA.2@38.7,458.083 ; C2_FAA.2@30.296,471.603 30.296,474.414 TT1_FAA.1@31.266,475.384 ; C2_FR.2@112.296,479.283 C2_FR.2@112.263,479.283 ; Jumper1_FR.2@112.306,492.163 110.366,492.163 108.706,490.503 108.706,479.923 109.346,479.283 C2_FR.2@112.263,479.283 ; R4.c_FR.2@116.13,479.213 116.02,479.103 112.263,479.103 C2_FR.2@112.263,479.283 ; TT1_FR.1@118.156,488.623 115.396,488.623 112.263,485.49 C2_FR.2@112.263,479.283
Vo(J2): C4_FAA.2 C4_FR.2 Jumper2_FAA.2 Jumper2_FR.2 R7_FAA.2 R7_FR.2 TT1_FAA.8 TT1_FR.8 | length 154.3
  Top Layer w1: v1@41.88,508.913 43.62,508.913 45.36,507.173 45.36,503.853 42.86,501.353 42.86,491.346 45.013,489.193 47.05,489.193 C4_FAA.2@49.33,486.913 ; v1(120.716,504.963) v1(130.696,504.963)
  Bottom Layer w1: Jumper2_FAA.2@39.25,505.663 39.25,506.473 v1(41.64,508.863) 44.317,508.863 45.617,507.563 118.116,507.563 v1(120.716,504.963) Jumper2_FR.2@120.786,501.783 ; TT1_FAA.8@46.506,483.004 49.33,485.828 C4_FAA.2@49.33,486.913 49.97,486.913 51.053,487.996 R7_FAA.2@54.09,487.996 ; v1(130.696,504.963) 130.696,502.813 R7_FR.2@130.796,502.713 132.336,502.713 133.396,501.653 TT1_FR.8@133.396,496.243 133.436,496.283 137.226,496.283 C4_FR.2@138.666,494.843
Vo(J3): C6_FAA.2 C6_FR.2 Jumper3_FAA.2 Jumper3_FR.2 R11_FAA.1 R11_FR.1 TT2_FAA.1 TT2_FR.1 | length 129.2
  Top Layer w1: C6_FAA.2@36.106,418.403 41.286,413.223 v1(50.2,413.223)
  Bottom Layer w1: C6_FAA.2@36.106,418.403 36.106,420.35 TT2_FAA.1@36.896,421.14 37.057,421.301 R11_FAA.1@37.057,425.583 ; Jumper3_FAA.2@50.2,416.073 v1(50.2,413.223) 58.933,413.223 69.1,423.39 85.06,423.39 ; R11_FR.1@97.186,435.226 97.186,433.486 ; C6_FR.2@102.166,428.996 102.166,432.437 TT2_FR.1@102.218,432.489 98.183,432.489 97.186,433.486 ; Jumper3_FR.2@114.666,417.503 114.666,415.156 113.56,414.05 94.4,414.05 85.06,423.39 ; 85.06,423.39 87.37,423.39 97.186,433.206 97.186,433.486
Vo(J4): C8_FAA.2 C8_FR.2 Jumper4_FAA.2 Jumper4_FR.2 R23_FAA.2 R23_FR.2 TT2_FAA.8 TT2_FR.8 | length 58.8
  Bottom Layer w1: Jumper4_FAA.2@41.03,440.893 41.03,442.623 41.5,443.093 48.3,443.093 53.42,437.973 C8_FAA.2@54.926,437.973 55.77,437.129 55.77,431.943 54.87,431.043 R23_FAA.2@52.059,431.043 52.059,428.837 TT2_FAA.8@52.136,428.76 ; Jumper4_FR.2@111.246,458.863 116.536,458.863 119.756,455.643 119.756,449.543 118.559,448.346 R23_FR.2@117.339,448.346 117.339,445.813 C8_FR.2@118.596,444.556 118.596,441.247 TT2_FR.8@117.458,440.109
Vo(J5): Jumper5_FAA.2 Jumper5_FR.2 R21_FAA.2 R21_FR.2 R22.b_FAA.2 R22.b_FR.2 R22_FAA.2 R22_FR.2 TT3_FAA.8 TT3_FR.8 | length 150.2
  Top Layer w1: v1(70.336,467.303) 71.036,466.603 82.846,466.603 84.636,464.813 84.636,461.633 82.786,459.783 ; v1(80.216,459.783) 82.786,459.783 ; v1(156.419,464.076) 132.866,464.076 131.743,462.953 123.747,462.953 122.4,464.3 121.66,464.3 121.472,464.488 120.201,464.488 120.066,464.353 115.487,464.353 115.392,464.258 111.414,464.258 109.176,462.02 109.176,459.906 109.053,459.783 108.919,459.783 107.876,458.74 83.83,458.74 82.786,459.783
  Bottom Layer w1: Jumper5_FAA.2@63.246,471.703 63.246,472.563 64.506,473.823 67.736,473.823 69.516,472.043 69.516,468.123 v1(70.336,467.303) ; R22_FAA.2@77.749,464.733 R21_FAA.2@77.749,462.333 ; v1@79.977,459.924 TT3_FAA.8@77.376,459.924 77.376,461.96 R21_FAA.2@77.749,462.333 ; R22.b_FAA.2@80.433,462.703 80.063,462.333 R21_FAA.2@77.749,462.333 ; Jumper5_FR.2@135.546,444.273 139.076,444.273 140.776,442.573 140.776,439.91 140.836,439.85 140.836,438.323 141.736,437.423 142.726,437.423 144.126,436.023 R22.b_FR.2@144.126,435.096 146.773,435.096 R22_FR.2@146.826,435.149 ; v1(156.419,464.076) R21_FR.2@156.419,461.243 156.419,458.629 TT3_FR.8@156.598,458.45
vref1: R4.1 R7.1 U12.3 | length 12.5
  Bottom Layer w1: R4.1@50.216,19.445 50.216,14.873 R7.1@49.073,13.73 49.073,13.222 51.232,11.063 U12.3@54.026,11.063
vref2: R5.1 R6.1 U13.3 | length 6.5
  Bottom Layer w1: R6.1@49.83,26.876 R6.1@49.96,26.746 ; R5.1@49.96,24.336 R6.1@49.96,26.746 ; U13.3@53.64,26.116 50.59,26.116 R6.1@49.96,26.746
pads on no net: R13_FAA.3 R13_FR.3 Rb-3.2 Rcomp1.1 Rcomp2.1 Rf2.1 U10.3 U12.5 U12.6 U13.5 U13.6 Unot1.4 Unot1.6 Unot1.8 Unot1.10 Unot1.12
copper on no net: | length 0.6
  Bottom Layer w1: 61.26,22.979 61.26,23.576